# Altium PCB M1.6_A2L1_32mm.PcbDoc
Units mm, origin at the board's own origin, x right, y up, seen from the top; angles counter-clockwise.
Board outline 32 x 60 mm, 2 copper layers (Top Layer, Bottom Layer); 54 components, 59 nets, 219 pads, 131 vias.
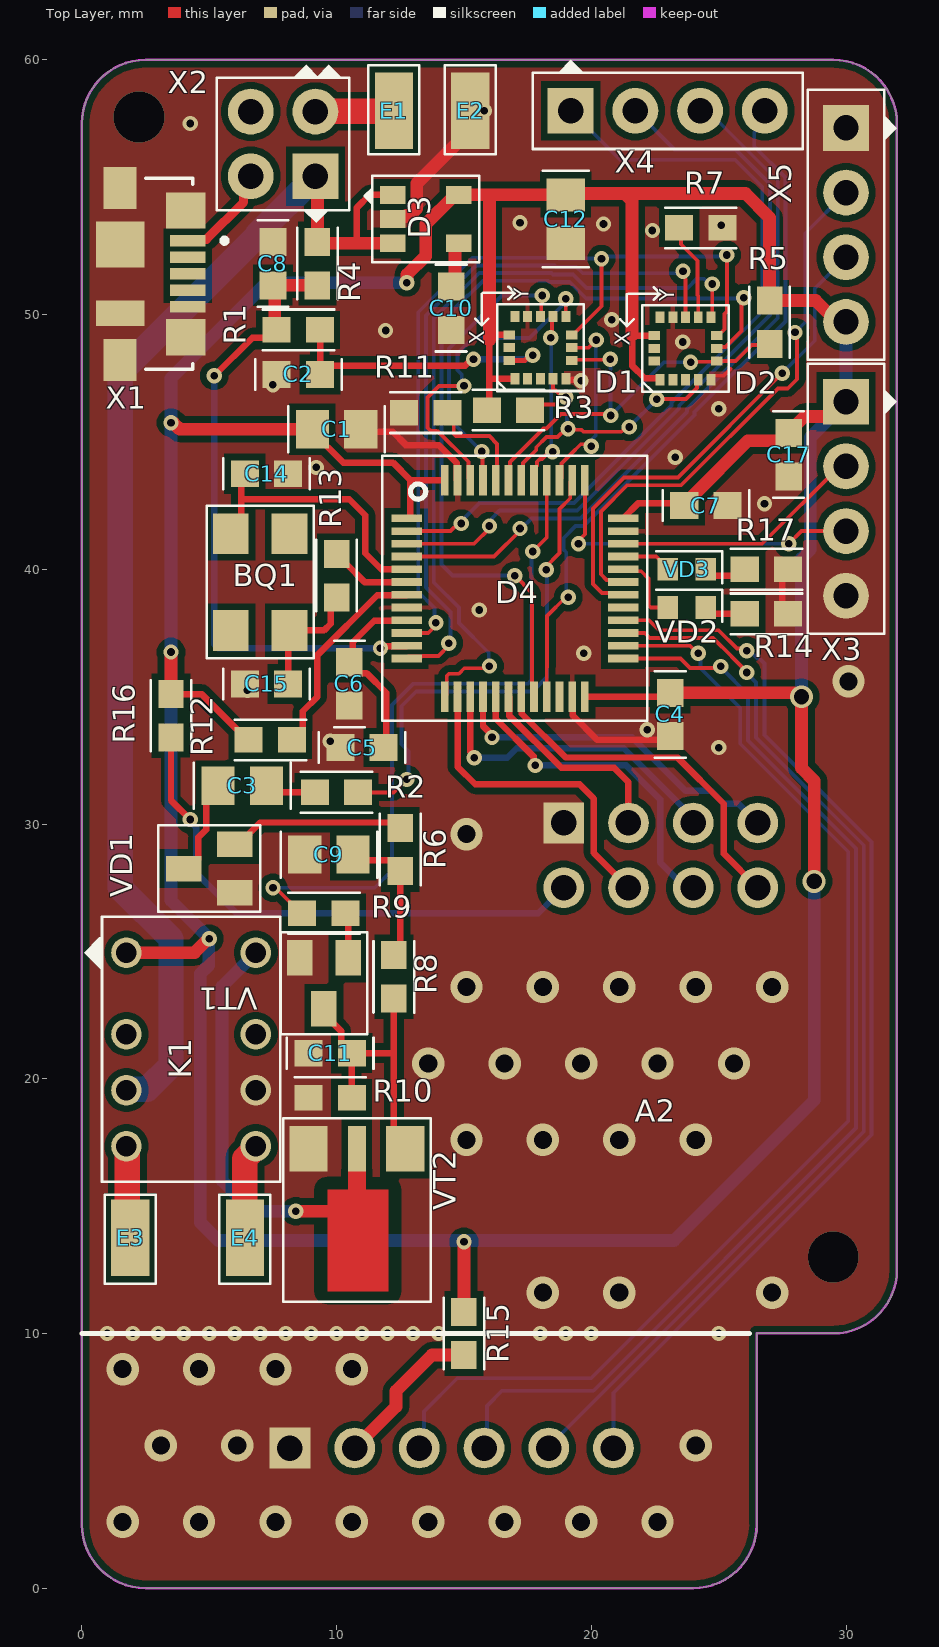
[diagram p0: Top Layer view]
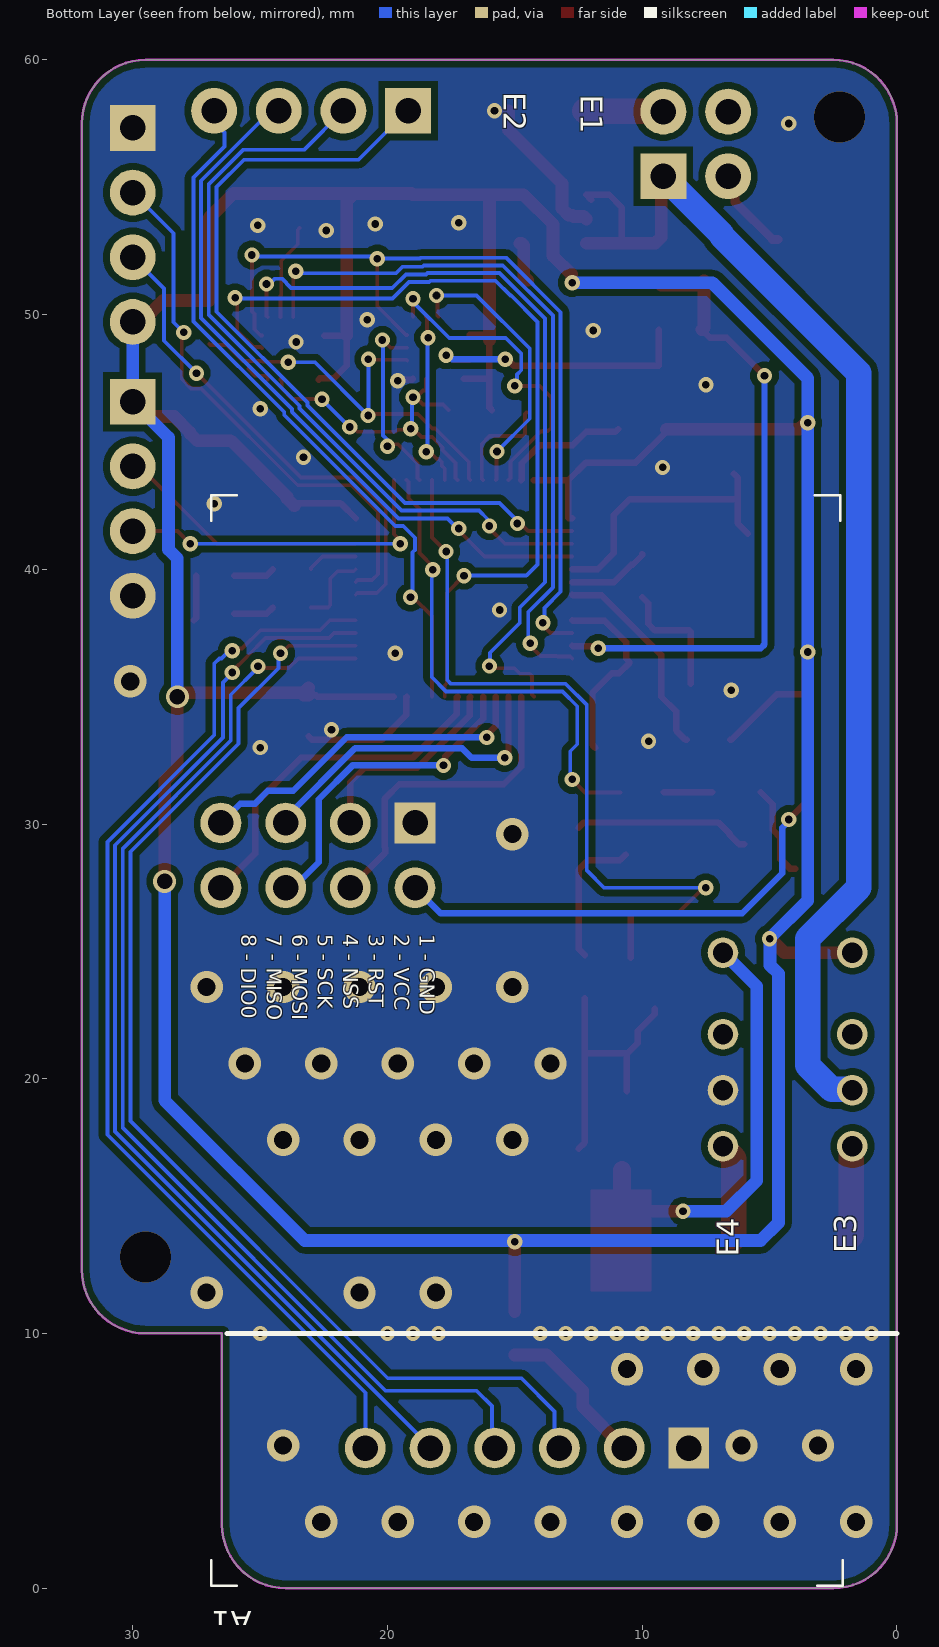
[diagram p1: Bottom Layer view, seen from below]
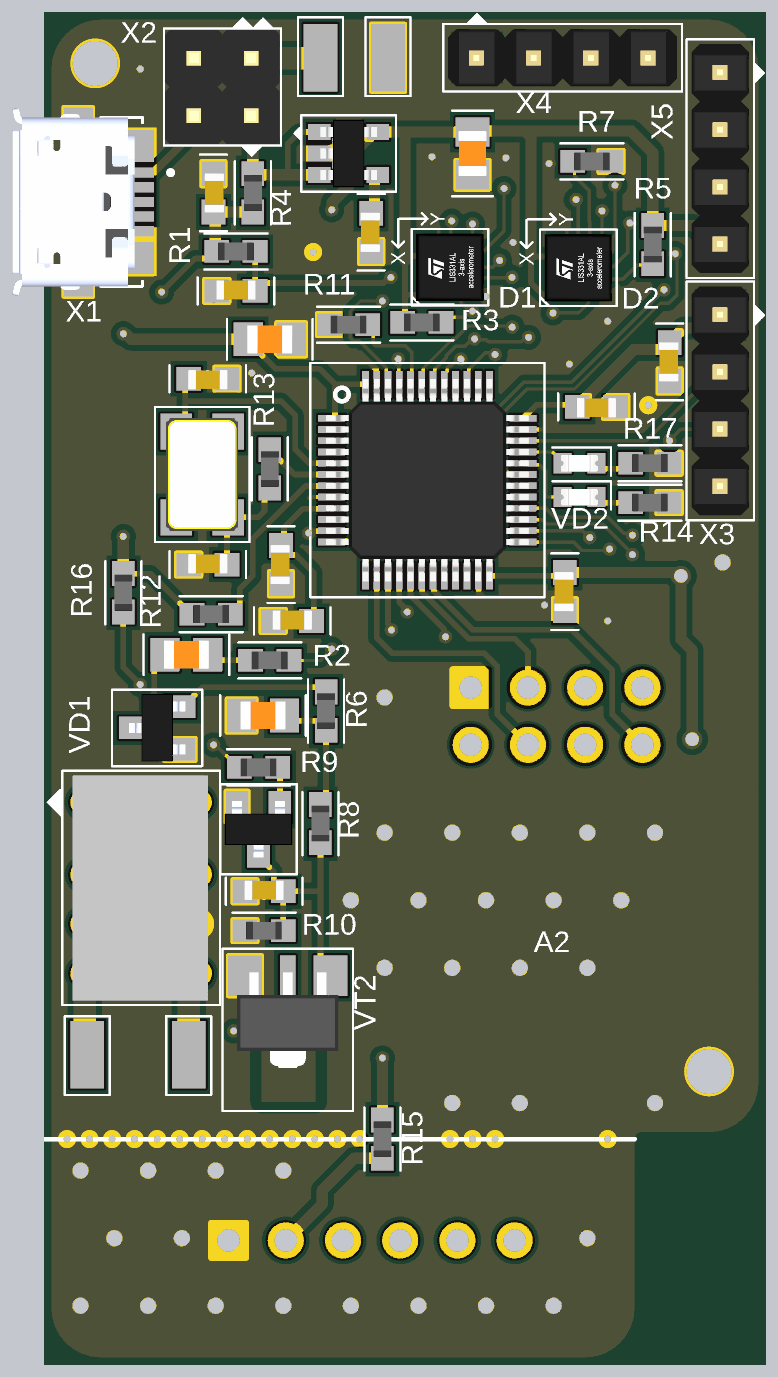
[diagram p2: 3D render of the assembled board from above, using the file's embedded part models]

## Layer stack, top to bottom
Top Solder: solder mask 0.0102, Solder Resist, Dk 3.5
Top Layer: signal copper 0.0356
Dielectric 1: dielectric 0.32, FR-4, Dk 4.8
Bottom Layer: signal copper 0.0356
Bottom Solder: solder mask 0.0102, Solder Resist, Dk 3.5

## Board outline
0,2.5 ccw(c2.5,2.5) 2.5,0 24,0 ccw(c24,2.5) 26.5,2.5 26.5,10 29.5,10 ccw(c29.5,12.5) 32,12.5 32,57.5 ccw(c29.5,57.5) 29.5,60 2.5,60 ccw(c2.5,57.5) 0,57.5

## Design rules (kind name [scope] priority, off if disabled: settings)
Clearance [All] p1: gap=0.254 ignorepadtopadclearanceinfootprint=TRUE except(0: Arc-Hole Track-Hole SMDPad-Hole THPad-Hole Via-Hole Fill-Hole Poly-Hole Region-Hole Text-Hole; 0.151: Track-SMDPad SMDPad-SMDPad SMDPad-THPad SMDPad-Via; 0.153: Arc-Arc Arc-Track Track-Track; 0.2: Arc-SMDPad Arc-Via Track-Via; 0.5: Fill-Fill Fill-Poly Fill-Region Region-Region)
HoleSize [All] p1: absolutevalues=TRUE maxlimit=2.54 minlimit=0.15 maxpercent=80.000 minpercent=20.000
MinimumSolderMaskSliver [All] p1: minsoldermaskwidth=0.1
PlaneClearance [All] p1: clearance=0.1
PlaneConnect [All] p1: planeconnectstyle=Direct reliefexpansion=0.508 reliefentries=4 reliefconductorwidth=0.254 reliefairgap=0.254
PolygonConnect [All] p1: connectstyle=Direct reliefconductorwidth=0.254 reliefentries=4 polygonreliefangle="90 Angle" airgapwidth=0.254
RoutingVias [All] p1: holewidth=0.3 width=1.27 viastyle="Through Hole" minholewidth=0.3 minwidth=0 maxholewidth=1 maxwidth=1.27
SilkToSilkClearance [All] p1: silktosilkclearance=0.151
SilkToSolderMaskClearance [IsPad] p1: minsilkscreentomaskgap=0.15 clearancetoexposedcopper=TRUE
SolderMaskExpansion [All] p1: expansion=0.102 istentingtop=FALSE
UnRoutedNet [All] p1: checkbadconnections=TRUE
Width [All] p1: maxlimit=1 minlimit=0.15 preferedwidth=0.254
23 further rules are at their usual default settings.

## Classes and differential pairs
net class UART_EXT: UART_RX UART_TX
net class SW_INT: SWCLK SWDIO
net class LED: LED1 LED2 UART_RX UART_TX
net class 8MHz: 8MHz_IN 8MHz_OUT NetBQ1_3

## Components (designator, comment, footprint, x,y, rotation, side; value= is the part's Value field where it differs from the comment)
A1 "Module SDCard-SPI 42*24mm" FileName=AdMainLibG_1.0:\PCBLib\0.pcblib#1 14.52,5.5 r90 bottom locked
A2 "Ra-01 (LoRa SX-1278)" FileName=AdMainLibG_1.0:\PCBLib\0.pcblib#2 22.73,28.77 r270 top locked
BQ1 "830055663" FileName=AdMainLibG_1.0:\PCBLib\0.pcblib#3 7,39.5 r270 top locked
C1 "10µ" FileName=AdMainLibG_1.0:\PCBLib\0.pcblib#4 10,45.5 r0 top
C2 "0.1µ" FileName=AdMainLibG_1.0:\PCBLib\0.pcblib#5 8.5,47.65 r180 top
C3 "10µ" FileName=AdMainLibG_1.0:\PCBLib\0.pcblib#4 6.3,31.5 r0 top locked
C4 "0.1µ" FileName=AdMainLibG_1.0:\PCBLib\0.pcblib#5 23.1,34.3 r270 top locked
C5 "0.1µ" FileName=AdMainLibG_1.0:\PCBLib\0.pcblib#5 11,33 r180 top locked
C6 "0.1µ" FileName=AdMainLibG_1.0:\PCBLib\0.pcblib#5 10.5,35.5 r270 top
C7 "0.1µ" FileName=AdMainLibG_1.0:\PCBLib\0.pcblib#5 24.5,42.5 r0 top
C8 "0.1µ" FileName=AdMainLibG_1.0:\PCBLib\0.pcblib#5 7.5,52 r90 top
C9 "10µ" FileName=AdMainLibG_1.0:\PCBLib\0.pcblib#4 9.7,28.8 r180 top
C10 "0.47 µ" FileName=AdMainLibG_1.0:\PCBLib\0.pcblib#5 14.5,50.25 r270 top
C11 "0.1µ" FileName=AdMainLibG_1.0:\PCBLib\0.pcblib#5 9.75,21 r180 top locked
C12 "10µ" FileName=AdMainLibG_1.0:\PCBLib\0.pcblib#4 19,53.75 r270 top locked
C14 "10p" FileName=AdMainLibG_1.0:\PCBLib\0.pcblib#5 7.25,43.75 r0 top locked
C15 "10p" FileName=AdMainLibG_1.0:\PCBLib\0.pcblib#5 7.25,35.5 r180 top locked
C17 "0.1µ" FileName=AdMainLibG_1.0:\PCBLib\0.pcblib#5 27.75,44.5 r270 top locked
D1 "LIS3DHTR" FileName=AdMainLibG_1.0:\PCBLib\0.pcblib#6 18,48.7 r90 top locked
D2 "LIS3DHTR" FileName=AdMainLibG_1.0:\PCBLib\0.pcblib#6 23.7,48.675 r90 top locked
D3 "MIC5219-3.3BM5-TR" FileName=AdMainLibG_1.0:\PCBLib\0.pcblib#7 13.5,53.75 r270 top locked
D4 "STM32F103C8T6TR" FileName=AdMainLibG_1.0:\PCBLib\0.pcblib#8 17,39.25 r270 top locked
E1 "Lamel_1pin" FileName=AdMainLibG_1.0:\PCBLib\0.pcblib#9 12.25,58 r0 top locked
E2 "Lamel_1pin" FileName=AdMainLibG_1.0:\PCBLib\0.pcblib#9 15.25,58 r0 top locked
E3 "Lamel_1pin" FileName=AdMainLibG_1.0:\PCBLib\0.pcblib#9 1.9,13.75 r180 top locked
E4 "Lamel_1pin" FileName=AdMainLibG_1.0:\PCBLib\0.pcblib#9 6.4,13.75 r180 top locked
K1 "IM02TS" FileName=AdMainLibG_1.0:\PCBLib\0.pcblib#10 4.29,21.15 r270 top locked
R1 "5K1" FileName=AdMainLibG_1.0:\PCBLib\0.pcblib#11 8.5,49.4 r0 top locked
R2 "0R" FileName=AdMainLibG_1.0:\PCBLib\0.pcblib#11 10,31.25 r180 top locked
R3 "10K" FileName=AdMainLibG_1.0:\PCBLib\0.pcblib#11 16.75,46.25 r180 top
R4 "5K1" FileName=AdMainLibG_1.0:\PCBLib\0.pcblib#11 9.25,52 r270 top
R5 "10K" FileName=AdMainLibG_1.0:\PCBLib\0.pcblib#11 27,49.7 r90 top locked
R6 "10K" FileName=AdMainLibG_1.0:\PCBLib\0.pcblib#11 12.5,29 r270 top locked
R7 "0R" FileName=AdMainLibG_1.0:\PCBLib\0.pcblib#11 24.3,53.4 r180 top locked
R8 "2K" FileName=AdMainLibG_1.0:\PCBLib\0.pcblib#11 12.25,24 r270 top locked
R9 "2K" FileName=AdMainLibG_1.0:\PCBLib\0.pcblib#11 9.5,26.5 r0 top locked
R10 "10K" FileName=AdMainLibG_1.0:\PCBLib\0.pcblib#11 9.75,19.25 r0 top
R11 "10K" FileName=AdMainLibG_1.0:\PCBLib\0.pcblib#11 13.5,46.15 r180 top
R12 "10K" FileName=AdMainLibG_1.0:\PCBLib\0.pcblib#11 7.4,33.3 r180 top locked
R13 "390R" FileName=AdMainLibG_1.0:\PCBLib\0.pcblib#11 10,39.75 r270 top locked
R14 "5K1" FileName=AdMainLibG_1.0:\PCBLib\0.pcblib#11 26.875,38.25 r0 top
R15 "0R" FileName=AdMainLibG_1.0:\PCBLib\0.pcblib#11 15,10 r90 top
R16 "0R" FileName=AdMainLibG_1.0:\PCBLib\0.pcblib#11 3.5,34.25 r90 top locked
R17 "5K1" FileName=AdMainLibG_1.0:\PCBLib\0.pcblib#11 26.875,40 r0 top
VD1 "BAS40-04-HE3-08" FileName=AdMainLibG_1.0:\PCBLib\0.pcblib#12 5,28.25 r270 top locked value=SOT-23-3
VD2 "19-213/GHC-YR1S2/3T" FileName=AdMainLibG_1.0:\PCBLib\0.pcblib#13 23.75,38.5 r0 top
VD3 "19-213/GHC-YR1S2/3T" FileName=AdMainLibG_1.0:\PCBLib\0.pcblib#13 23.75,40 r0 top
VT1 "BC846A,215" FileName=AdMainLibG_1.0:\PCBLib\0.pcblib#12 9.5,23.75 r0 top locked
VT2 "BC868-25,115" FileName=AdMainLibG_1.0:\PCBLib\0.pcblib#14 10.8,15.15 r180 top
X1 "47346-0001" FileName=AdMainLibG_1.0:\PCBLib\0.pcblib#15 1.5,51.6 r270 top
X2 "Header 2X2" FileName=AdMainLibG_1.0:\PCBLib\0.pcblib#16 7.9,56.7 r180 top locked
X3 "Header 1X4" FileName=AdMainLibG_1.0:\PCBLib\0.pcblib#17 30,42.77 r270 top locked
X4 "Header 1X4" FileName=AdMainLibG_1.0:\PCBLib\0.pcblib#17 23,58 r0 top locked
X5 "Header 1X4" FileName=AdMainLibG_1.0:\PCBLib\0.pcblib#17 30,53.52 r270 top locked

## Footprints (in the part's own frame and the unit in brackets; to place one, negate y for a bottom-side part, rotate by r counter-clockwise, add the part's x,y. Pads: shape width x height; smd on the part's side, far side on the other; paste and mask are expansions set on the pad)
FileName=AdMainLibG_1.0:\PCBLib\0.pcblib#1 [mm] "Arduino MicroSD to SPI Card reader 42*24*12mm"
  rect 1.6x1.6 hole 1: 1(0,-6.35)
  round 1.6 hole 1: 2(0,-3.81) 3(0,-1.27) 4(0,1.27) 5(0,3.81) 6(0,6.35)
  silkscreen extent -5.4,-12.4 37.4,12.4
FileName=AdMainLibG_1.0:\PCBLib\0.pcblib#2 [mm] "Ra-01"
  rect 1.6x1.6 hole 1 unplated mask+0.15: 1(-1.27,-3.81)
  round 1.6 hole 1 mask+0.15: 2(1.27,-3.81) 3(-1.27,-1.27) 4(1.27,-1.27) 5(-1.27,1.27) 6(1.27,1.27) 7(-1.27,3.81) 8(1.27,3.81)
FileName=AdMainLibG_1.0:\PCBLib\0.pcblib#3 [mm] "WE-830055663"
  rect 1.6x1.4 smd: 1(-1.9,-1.15) 2(1.9,-1.15) 3(1.9,1.15) 4(-1.9,1.15)
  silkscreen extent -3,-2.1 3,2.1, body extent -2.5,-1.6 2.5,1.6, height 1
FileName=AdMainLibG_1.0:\PCBLib\0.pcblib#4 [mm] "CC0805KKX7R6BB106"
  rect 1.3x1.5 smd: 1(-0.95,0) 2(0.95,0)
  silkscreen extent -1.9,-0.9 1.9,0.9, body extent -1,-0.63 1,0.63, height 0.8
FileName=AdMainLibG_1.0:\PCBLib\0.pcblib#5 [mm] "CC0603KRX7R9BB104"
  rect 1.1x1.05 smd paste+0: 1(-0.85,0)
  rect 1.1x1.05 smd: 2(0.85,0)
  silkscreen extent -1.7,-0.6 1.7,0.6, body extent -0.87,-0.48 0.87,0.4, height 0.95
FileName=AdMainLibG_1.0:\PCBLib\0.pcblib#6 [mm] "LIS3DHTR (3*3)"
  rect 0.45x0.35 smd paste-1 mask+0.05: 1(-1.225,1)
  rect 0.45x0.35 smd mask+0.05: 2(-1.225,0.5) 3(-1.225,0) 4(-1.225,-0.5) 5(-1.225,-1) 9(1.225,-1) 10(1.225,-0.5) 11(1.225,0) 12(1.225,0.5) 13(1.225,1)
  rect 0.35x0.45 smd mask+0.05: 6(-0.5,-1.225) 7(0,-1.225) 8(0.5,-1.225) 14(0.5,1.225) 15(0,1.225) 16(-0.5,1.225)
  silkscreen extent -1.7,-1.7 2.4,2.56, body extent -1.5,-1.5 1.5,1.5, height 1.01
FileName=AdMainLibG_1.0:\PCBLib\0.pcblib#7 [mm] "MIC5219-3.3BM5-TR"
  rect 0.7x1 smd: 1(-0.95,-1.3) 2(0,-1.3) 3(0.95,-1.3) 4(0.95,1.3) 5(-0.95,1.3)
  silkscreen extent -1.7,-2.4 1.7,2.1, body extent -1.5,-1.25 1.5,1.25, height 1.05
FileName=AdMainLibG_1.0:\PCBLib\0.pcblib#8 [mm] "Dest: STM32F103C8T6 - (7*7)"
  rect 0.3x1.2 smd: 1(-2.75,-4.25) 2(-2.25,-4.25) 3(-1.75,-4.25) 4(-1.25,-4.25) 5(-0.75,-4.25) 6(-0.25,-4.25) 7(0.25,-4.25) 8(0.75,-4.25) 9(1.25,-4.25) 10(1.75,-4.25) 11(2.25,-4.25) 12(2.75,-4.25) 25(2.75,4.25) 26(2.25,4.25) 27(1.75,4.25) 28(1.25,4.25) 29(0.75,4.25) 30(0.25,4.25) 31(-0.25,4.25) 32(-0.75,4.25) 33(-1.25,4.25) 34(-1.75,4.25) 35(-2.25,4.25) 36(-2.75,4.25)
  rect 1.2x0.3 smd: 13(4.25,-2.75) 14(4.25,-2.25) 15(4.25,-1.75) 16(4.25,-1.25) 17(4.25,-0.75) 18(4.25,-0.25) 19(4.25,0.25) 20(4.25,0.75) 21(4.25,1.25) 22(4.25,1.75) 23(4.25,2.25) 24(4.25,2.75) 37(-4.25,2.75) 38(-4.25,2.25) 39(-4.25,1.75) 40(-4.25,1.25) 41(-4.25,0.75) 42(-4.25,0.25) 43(-4.25,-0.25) 44(-4.25,-0.75) 45(-4.25,-1.25) 46(-4.25,-1.75) 47(-4.25,-2.25) 48(-4.25,-2.75)
  silkscreen extent -5.2,-5.2 5.2,5.2, body extent -4.5,-4.5 4.5,4.5, height 1.6
FileName=AdMainLibG_1.0:\PCBLib\0.pcblib#9 [mm]
  rect 1.5x3 smd: 1(0,0)
  silkscreen extent -1,-1.7 1,1.79
FileName=AdMainLibG_1.0:\PCBLib\0.pcblib#10 [mm] "IM02TS (THT VERSION)"
  round 1.2 hole 0.8: 1(-3.8,-2.54) 2(-0.6,-2.54) 3(1.6,-2.54) 4(3.8,-2.54) 5(3.8,2.54) 6(1.6,2.54) 7(-0.6,2.54) 8(-3.8,2.54)
  silkscreen extent -5.2,-4.2 5.2,3.5, body extent -4.99,-3.04 5.01,2.96, height 4.65
FileName=AdMainLibG_1.0:\PCBLib\0.pcblib#11 [mm]
  rect 1.1x1 smd: 1(-0.85,0) 2(0.85,0)
  silkscreen extent -1.4,-0.8 1.4,0.8, body extent -0.8,-0.4 0.8,0.4, height 0.45
FileName=AdMainLibG_1.0:\PCBLib\0.pcblib#12 [mm] "BC846"
  rect 1x1.4 smd: 1(0.95,1) 2(-0.95,1) 3(0,-1)
  silkscreen extent -1.7,-2 1.7,2, body extent -1.5,-1.25 1.5,1.25, height 1.1
FileName=AdMainLibG_1.0:\PCBLib\0.pcblib#13 [mm] "Led_19/213_EVERLIGHT"
  rect 0.8x0.9 smd: 1(-0.75,0) 2(0.75,0)
  silkscreen extent -1.2,-0.55 1.4,0.7, body extent -0.83,-0.37 0.82,0.36, height 0.68
FileName=AdMainLibG_1.0:\PCBLib\0.pcblib#14 [mm] "BC868 Transistor NPN"
  rect 1.5x1.8 smd: 1(1.9,-2.1) 3(-1.9,-2.1)
  rect 0.7x1.8 smd: 2(0,-2.1)
  Top Layer region: -1.237,-0.5 1.163,-0.5 1.163,3.5 -1.237,3.5
  Top Layer lines w0.7: 0,-0.5 0,-1.275
  silkscreen extent -2.9,-3.3 2.9,3.9, body extent -2.25,-2.25 2.25,2, height 1.54
FileName=AdMainLibG_1.0:\PCBLib\0.pcblib#15 [mm] "Molex MicroUSB 473460001"
  rect 0.45x1.38 smd: 1(-1.3,2.66) 2(-0.65,2.66) 3(0,2.66) 4(0.65,2.66) 5(1.3,2.66)
  rect 1.425x1.55 smd: S1(-2.488,2.575) S2(2.487,2.575)
  rect 1.65x1.3 smd: S3(-3.375,0) S6(3.375,0)
  rect 1.8x1.9 smd: S4(-1.15,0)
  rect 1x1.9 smd: S5(1.55,0)
  silkscreen extent -3.75,1 3.75,4.2, body extent -4.18,-2.93 4.18,2.5, height 2.7
FileName=AdMainLibG_1.0:\PCBLib\0.pcblib#16 [mm] "2R2 ( pitch 2.54mm) KLS1-207-2-2S"
  rect 1.8x1.8 hole 1: 1(-1.27,1.27)
  round 1.8 hole 1: 2(-1.27,-1.27) 3(1.27,1.27) 4(1.27,-1.27)
  silkscreen extent -2.6,-3.1 2.6,3.1, body extent -2.54,-2.54 2.54,2.54, height 8.54
FileName=AdMainLibG_1.0:\PCBLib\0.pcblib#17 [mm] "1R4 ( pitch 2.54mm) KLS1-207-1-4S"
  rect 1.8x1.8 hole 1: 1(-3.81,0)
  round 1.8 hole 1: 2(-1.27,0) 3(1.27,0) 4(3.81,0)
  silkscreen extent -5.3,-1.5 5.3,2, body extent -5.08,-1.27 5.08,1.27, height 9.2

## Part data
A1: library part "Module SDCard-SPI", "MicroSD Card adapter (42*24mm)/Arduino", Current consumption typ(max)="80mA (200mA)", Supply voltage=5±0.5V, ComponentLink1Description=Link, ComponentLink1URL=http://datalogger.pbworks.com/w/file/fetch/89507207/Datalogger%20-%20SD%20Memory%20Reader%20Datasheet.pdf, Connections="6pin IDC1-6", Dimensions=42*24*12mm, Manufacture Part Number="Module SDCard-SPI 42*24mm", Support format="Micro SDCard(<=2G), Micro SDHC(<=32G)", Weight=5g
A2: library part "Module SX1278", "SX1278 LoRa  433 MHZ/SPI /Spring Antenna/Ra - 01", ComponentLink1Description=Link, ComponentLink1URL=http://www.ai-thinker.com/pro_view-5.html, Manufacture Part Number="Ra-01 (LoRa SX-1278)"
BQ1: "WE-XTAL QUARTZ CRYSTAL 8.0 MHZ", Digi-Key Part Number=1923-830055663TR-ND, ESR (Equivalent Series Resistance)="150 Ohms", Frequency="8 MHz", Frequency Stability=±30ppm, Frequency Tolerance=±20ppm, Load Capacitance=18pF, Manufacture="Würth Elektronik", Operating Mode=Fundamental, Package/Case="4-SMD, No Lead", Catagory="Crystals, Oscillators, Resonators, Crystals", ComponentLink1Description=HelpURL, ComponentLink1URL=https://www.digikey.com/en/products/detail/w%C3%BCrth-elektronik/830055663/13900244?s=N4IgTCBcDaIBwGYAMSCsqBsGEgLoF8g, Manufacture Part Number=830055663, Price ($)=$0.65, Series=CFPX-104, Type="MHz Crystal"
C1 C3 C9 C12: library part CC0805KKX7R6BB106, "CAP CER 10UF 10V X7R 0805", Digi-Key Part Number=311-1879-2-ND, Manufacture=YAGEO, Package/Case="0805 (2012 Metric)", Temperature Coefficient=X7R, Tolerance=±10%, Capacitance=10µ, Catagory="Capacitors, Ceramic Capacitors", ComponentLink2Description=Link, ComponentLink2URL=https://www.digikey.com/en/products/detail/yageo/CC0805KKX7R6BB106/5195285, Manufacture Part Number=CC0805KKX7R6BB106, Price($/10)=$1.62
C2 C4 C5 C6 C7 C8 C11 C17: library part CC0603KRX7R9BB104, "CAP CER 0.1UF 50V X7R 0603", Digi-Key Part Number=311-1344-2-ND, Manufacture=YAGEO, Package/Case="0603 (1608 Metric)", Temperature Coefficient=X7R, Tolerance=±10%, Capacitance=0.1µ, Catagory="Capacitors, Ceramic Capacitors", ComponentLink2Description=Link, ComponentLink2URL=https://www.digikey.com/en/products/detail/yageo/CC0603KRX7R9BB104/2103082?s=N4IgTCBcDaIMJwAwDZEGYDSAlAGgdiwE4AhYgRkQBYQBdAXyA, Manufacture Part Number=CC0603KRX7R9BB104, Price($/10)=$0.54
C10: library part CC0603KRX7R6BB474, "CAP CER 0.47UF 10V X7R 0603", Digi-Key Part Number=311-1798-2-ND, Manufacture=YAGEO, Package/Case="0603 (1608 Metric)", Temperature Coefficient=X7R, Tolerance=±10%, Capacitance="0.47 µ", Catagory="Capacitors, Ceramic Capacitors", ComponentLink2Description=Link, ComponentLink2URL=https://www.yageo.com/upload/media/product/productsearch/datasheet/mlcc/UPY-GPHC_X7R_6.3V-to-50V_20.pdf, ComponentLink3Description="Link supplier", ComponentLink3URL=https://www.digikey.com/en/products/detail/yageo/CC0603KRX7R6BB474/5195206?s=N4IgTCBcDaIMJwAwDZEGYDSAlAGgdi2QCEiAWPUkAXQF8g, Manufacture Part Number=CC0603KRX7R6BB474, Price($/10)=$1.22
C14 C15: library part CQ0603JRNPO9BN100, "CAP CER 10PF 50V C0G/NPO 0603", Digi-Key Part Number=CQ0603JRNPO9BN100-ND, Manufacture=YAGEO, Package/Case="0603 (1608 Metric)", Temperature Coefficient="COG, NPO", Tolerance=±5%, Capacitance=10p, Catagory="Capacitors, Ceramic Capacitors", ComponentLink2Description=Link, ComponentLink2URL=https://www.digikey.com/en/products/detail/yageo/cq0603jrnpo9bn100/6097785, Manufacture Part Number=CQ0603JRNPO9BN100, Price($/20k)=$970,8
D1 D2: "ACCEL 2-16G I2C/SPI 16LGA", Digi-Key Part Number="497-10613-2-ND - Tape & Reel", Manufacture=STMicroelectronics, Package/Case="16-LGA (3x3)", Catagory="Sensors, Transducers, Motion Sensors - Accelerometers", ComponentLink2Description=Link, ComponentLink2URL=https://www.st.com/en/mems-and-sensors/lis3dh.html, ComponentLink3Description="Link Supplier", ComponentLink3URL=https://www.digikey.com/en/products/detail/stmicroelectronics/LIS3DHTR/2334338?s=N4IgTCBcDaIDIEkDKBmAIgCQCoCUQF0BfIA, Manufacture Part Number=LIS3DHTR, Price($)=$2.11000
D3: "IC REG LINEAR 3.3V 500MA SOT23-5", Current - Output=500mA, Current - Quiescent (Iq)="8 µA", Manufacture="Microchip Technology", Package/Case=SOT-23-5, Voltage - Input (Max)=12V, Voltage - Output (Min/Fixed)=3.3V, Voltage Dropout (Max)="0.6V @ 500mA", Catagory="Integrated Circuits (ICs), Power Management (PMIC), Voltage Regulators - Linear", ComponentLink2Description=Link, ComponentLink2URL=https://ww1.microchip.com/downloads/en/DeviceDoc/MIC5219-500mA-Peak-Output-LDO-Regulator-DS20006021A.pdf, ComponentLink3Description="Link Supplier", ComponentLink3URL=https://www.digikey.com/en/products/detail/microchip-technology/MIC5219-3-3BM5-TR/771289?s=N4IgTCBcDaILIEkDCBWMBGAnAWgMwDpcAhOFEAXQF8g, Control Features=Enable, Digi-Key Part Number=MIC5219-3.3BM5-TR, Manufacture Part Number=MIC5219-3.3BM5-TR, PSRR="75dB (120Hz)"
D4: library part STM32F103C8T6, "ARM® Cortex®-M3 STM32F1 Microcontroller IC 32-Bit Single-Core 72MHz 64KB (64K x 8) FLASH 48-LQFP (7x7)", Digi-Key Part Number=497-17666-2-ND, Manufacture=STMicroelectronics, Package/Case=48-LQFP, Catagory="Integrated Circuits (ICs), Embedded Microcontrollers", ComponentLink2Description=Link, ComponentLink2URL=https://www.digikey.com/en/products/detail/stmicroelectronics/STM32F103C8T6TR/2122442, Manufacture Part Number=STM32F103C8T6TR, Price($)=$7.64, sym_version=1
K1: "RELAY TELECOM DPDT 2A 4.5VDC", Coil Voltage=4.5VDC, Contact Rating (Current)="2 A", Digi-Key Part Number=PB1093-ND, Manufacture="TE Connectivity Potter & Brumfield Relays", Switching Voltage="250VAC, 220VDC - Max", Catagory="Relays, Signal Relays, Up to 2 Amps", ComponentLink2Description="Link Supplier", ComponentLink2URL=https://www.digikey.com/en/products/detail/te-connectivity-potter-brumfield-relays/IM02TS/1633979?s=N4IgTCBcDaIJIFkAMYAqBlEBdAvkA, ComponentLink3Description=Link, ComponentLink3URL=https://www.te.com/commerce/DocumentDelivery/DDEController?Action=srchrtrv&DocNm=1-1773734-7_IM_Relay_I_Type&DocType=DS&DocLang=English, Contact Form="DPDT (2 Form C)", Manufacture Part Number=IM02TS, Mounting Type="Through Hole", Price($)=$4.59, Series="IM, AXICOM"
R1 R4 R14 R17: library part RC0603FR-075K1L, "RES 5K1 OHM 1% 1/10W 0603", Digi-Key Part Number=311-5.10KHRTR-ND, Manufacture=Yageo, Package/Case="0603 (1608 Metric)", Power(Watts)="0.1W, 1/10W", Tolerance=±1%, Catagory=Resistors, ComponentLink1Description=HelpURL, ComponentLink1URL=https://www.digikey.com/en/products/detail/yageo/RC0603FR-075K1L/727268?s=N4IgTCBcDaIEoGEAMA2JBmAYnAtEg7AKwDSAjADIgC6AvkA, Manufacture Part Number=RC0603FR-075K1L, Price 1k($)=$3.90, Resistance=5K1
R2 R7 R15 R16: library part RC0603FR-070RL, "RES 0 OHM JUMPER 1/10W 0603", Digi-Key Part Number=311-0.0HRTR-ND, Manufacture=Yageo, Package/Case="0603 (1608 Metric)", Power(Watts)="0.1W, 1/10W", Tolerance=±1%, Catagory=Resistors, ComponentLink1Description="Link Supplier", ComponentLink1URL=https://www.digikey.com/en/products/detail/yageo/RC0603FR-075K1L/727268?s=N4IgTCBcDaIEoGEAMA2JBmAYnAtEg7AKwDSAjADIgC6AvkA, ComponentLink2Description=Link, ComponentLink2URL=https://www.yageo.com/upload/media/product/productsearch/datasheet/rchip/PYu-RC_Group_51_RoHS_L_12.pdf, Manufacture Part Number=RC0603FR-070RL, Price 1k($)=$3.29, Resistance=0R
R3 R5 R6 R10 R11 R12: library part RC0603FR-0710KL, "RES 10K OHM 1% 1/10W 0603", Digi-Key Part Number=311-10.0KHRTR-ND, Manufacture=Yageo, Package/Case="0603 (1608 Metric)", Power(Watts)="0.1W, 1/10W", Tolerance=±1%, Catagory=Resistors, ComponentLink1Description=HelpURL, ComponentLink1URL=https://www.digikey.com/en/products/detail/yageo/RC0603FR-0710KL/726880?s=N4IgTCBcDaIEoGEAMA2JBmAYnAtEg7AIxIDSAMiALoC%2BQA, Manufacture Part Number=RC0603FR-0710KL, Price 1k($)=$3.90, Resistance=10K
R8 R9: library part RC0603FR-072KL, "RES 2K OHM 1% 1/10W 0603", Digi-Key Part Number=311-2.00KHRTR-ND, Manufacture=Yageo, Package/Case="0603 (1608 Metric)", Power(Watts)="0.1W, 1/10W", Tolerance=±1%, Catagory=Resistors, ComponentLink1Description="Link Supplier", ComponentLink1URL=https://www.digikey.com/en/products/detail/yageo/RC0603FR-072KL/727009?s=N4IgTCBcDaIEoGEAMA2JBmAYnAtEg7GANIAyIAugL5A, ComponentLink2Description=Link, ComponentLink2URL=https://www.yageo.com/upload/media/product/productsearch/datasheet/rchip/PYu-RC_Group_51_RoHS_L_12.pdf, Manufacture Part Number=RC0603FR-072KL, Price 1k($)=$3.90, Resistance=2K
R13: library part RC0603FR-07390RL, "RES 390 OHM 1% 1/10W 0603", Digi-Key Part Number=311-390HRTR-ND, Manufacture=Yageo, Package/Case="0603 (1608 Metric)", Power(Watts)="0.1W, 1/10W", Tolerance=±1%, Catagory=Resistors, ComponentLink1Description=HelpURL, ComponentLink1URL=https://www.digikey.com/en/products/detail/yageo/RC0603FR-07390RL/727198, Manufacture Part Number=RC0603FR-07390RL, Price 1k($)=$3.90, Resistance=390R
VD1: library part BAS40-04, "DIODE ARRAY SCHOTTKY 40V SOT23", Current - Average Rectified (Io) (per Diode)=200mA, Current - Reverse Leakage @ Vr="100 nA @ 30 V", Digi-Key Part Number=112-BAS40-04-HE3-08TR-ND, Manufacture="Vishay General Semiconductor - Diodes Division", Package/Case=SOT-23-3, Voltage - DC Reverse (Vr) (Max)="40 V", Voltage - Forward (Vf) (Max) @ If="1 V @ 40 mA", Catagory="Discrete Semiconductor Products, Diodes - Rectifiers - Arrays", ComponentLink2Description="Link Supplier", ComponentLink2URL=https://www.digikey.com/en/products/detail/vishay-general-semiconductor-diodes-division/BAS40-04-HE3-08/4830200, ComponentLink3Description=Link, ComponentLink3URL=https://www.vishay.com/docs/85701/bas40v.pdf, Diode Configuration="1 Pair Series Connection", Diode Type=Schottky, Manufacture Part Number=BAS40-04-HE3-08, Price 10pcs($)="$3.03 per 10pcs", Reverse Recovery Time (trr)="5 ns"
VD2 VD3: "LED GREEN CLEAR 0603 SMD", Color=Green, Current - Test=20mA, Digi-Key Part Number=19-213/GHC-YR1S2/3T-ND, Lens Color=Colorless, Manufacture="Everlight Electronics Co Ltd", Millicandela Rating=199mcd, Package/Case="0603 (1608 Metric)", Voltage - Forward (Vf) (Typ)=3.3V, Catagory="Optoelectronics, LED Indication - Discrete", ComponentLink1Description=HelpURL, ComponentLink1URL=https://www.digikey.com/en/products/detail/everlight-electronics-co-ltd/19-213-GHC-YR1S2-3T/2691511?s=N4IgTCBcDaIDIFMAmACAjATgLRjQZgHoBxACQGEsBNAJTQGUwC8AVEAXQF8g, Height(Max)=0.70mm, Lens Size="1.20mm x 0.80mm", Lens Style="Rectangle with Flat Top", Lens Transparency=Clear, Manufacture Part Number=19-213/GHC-YR1S2/3T, Price 1k($)=$7.02, Viewing Angle=120°, Wavelength - Dominant=528nm, Wavelength - Peak=518nm
VT1: library part BC846, "TRANS NPN 65V 0.1A SOT-23-3", Current - Collector (Ic) (Max)="100 mA", Current - Collector Cutoff (Max)="15nA (ICBO)", DC Current Gain (hFE) (Min) @ Ic, Vce="110 @ 2mA, 5V", Digi-Key Part Number=1727-4239-2-ND, Frequency - Transition=100MHz, Manufacture="Nexperia USA Inc.", Operating Temperature="150°C (TJ)", Package/Case=SOT-323, Power(Watts)="250 mW", Voltage - Collector Emitter Breakdown (Max)="65 V", Catagory="Discrete Semiconductor Products, Transistors - Bipolar (BJT) - Single", ComponentLink1Description="Link Supplier", ComponentLink1URL=https://www.digikey.com/en/products/detail/nexperia-usa-inc/BC846A-215/1232259, ComponentLink2Description=Link, ComponentLink2URL=https://assets.nexperia.com/documents/data-sheet/BC846XW_SER.pdf, Manufacture Part Number=BC846A,215, Price ($)=$0.14, Vce Saturation (Max) @ Ib, Ic="400mV @ 5mA, 100mA"
VT2: library part BC868-25, "TRANS NPN 20V 2A SOT89", Current - Collector (Ic) (Max)="2 A", Current - Collector Cutoff (Max)="100nA (ICBO)", DC Current Gain (hFE) (Min) @ Ic, Vce="160 @ 500mA, 1V", Digi-Key Part Number=1727-1568-2-ND, Frequency - Transition=170MHz, Manufacture="Nexperia USA Inc.", Operating Temperature="150°C (TJ)", Package/Case=TO-243AA, Power(Watts)="500 mW", Voltage - Collector Emitter Breakdown (Max)="20 V", Catagory="Discrete Semiconductor Products, Transistors - Bipolar (BJT) - Single", ComponentLink1Description=Link, ComponentLink1URL=https://assets.nexperia.com/documents/data-sheet/BCP68_BC868_BC68PA.pdf, ComponentLink2Description="Link Supplier", ComponentLink2URL=https://www.digikey.com/en/products/detail/nexperia-usa-inc/BC868-25-115/1232370, Manufacture Part Number=BC868-25,115, Price ($)=$0.54, Transistor Type=NPN, Vce Saturation (Max) @ Ib, Ic="600mV @ 200mA, 2A"
X1: "CONN RCPT USB2.0 MICRO B SMD R/A", Current Rating (Amps)="1A, 1.8A", Digi-Key Part Number=WM17141TR-ND, Manufacture=Molex, Material Flammability Rating="UL94 V-0", Voltage - Rated=30VAC, Connector Type="USB - micro B", Contact Finish=Gold, Manufacture Part Number=47346-0001, Mating Cycles=10000, Mounting Feature=Horizontal, Mounting Type="Surface Mount, Right Angle", Series=47346, Shell/Shielding Material="Steel, Stainless", Shielding=Shielded, SnapEDA_Link=https://www.snapeda.com/parts/47346-0001/Molex/view-part/53503/?ref=snap, Specifications="USB 2.0"
X2: library part KLS1-207-2-2S, "2X2 Pin Header Double Row Through Hole Pitch 2.54(PLS-2)", Manufacture="Assmann WSW components, Inc", Manufacture Part Number="Header KLS1-207-2-2S", Catagory="Connector Headers and PCB Receptacles", ComponentLink1Description=HelpURL, ComponentLink1URL=https://www.arrow.com/en/products/aw140-eg-g02a/assmann-wsw-components-inc
X3 X4 X5: library part KLS1-207-1-4S, "1X4 Pin Header Single Row Through Hole Pitch 2.54", Manufacture="Assmann WSW components, Inc", Catagory="Connector Headers and PCB Receptacles", ComponentLink1Description=HelpURL, ComponentLink1URL=https://www.arrow.com/en/products/aw140-eg-g02a/assmann-wsw-components-inc

## Via types
v1: diameter 0.6, hole 0.3, Top Layer to Bottom Layer, tented both sides, 73 vias
v2: diameter 1.27, hole 0.711, Top Layer to Bottom Layer, tented both sides, 34 vias
v3: diameter 0.6, hole 0.3, Top Layer to Bottom Layer, 20 vias
v4: diameter 2, hole 2, Top Layer to Bottom Layer, 2 vias
v5: diameter 0.9, hole 0.6, Top Layer to Bottom Layer, tented both sides, 2 vias

## Nets (pads, with @x,y where several pads share a name; then routed paths per layer and width w, separated by ;. In a path a pad name is that pad's centre, name@x,y a point inside that pad or via, vN(x,y) a via of type N, cw(c..) or ccw(c..) an arc to the next point about the centre after c; other vN are vias at no path point)
8MHz_IN: BQ1.1 C14.1 D4.5 | length 11.1
  Top Layer w0.254: BQ1.1 6.25,41.8 6.25,42.75 ; C14.1 6.25,43.6 6.25,42.75 ; D4.5 11.75,40 11.125,40.625 11.125,42.125 10.5,42.75 6.25,42.75
8MHz_OUT: D4.6 R13.1 | length 3.2
  Top Layer w0.254: R13.1 10,40.55 10.373,40.177 10.423,40.177 11.1,39.5 D4.6
GND: A1.1 A2.1 C1.2 C2.2 C4.2 C5.2 C6.2 C7.2 C8.2 C9.2 C10.2 C11.2 C12.2 C14.2 C15.2 C17.2 D1.5 D1.12 D2.5 D2.12 D3.2 D4.8 D4.23 D4.35 D4.47 E2.1 K1.6 R7.1 R10.1 R11.2 R14.2 R17.2 VD1.1 VT1.2 VT2.1 X1.5 X1.S1 X1.S2 X1.S3 X1.S4 X1.S5 X1.S6 X3.4 X5.1 | length 19.3
  Top Layer w0.15: D2.5 24.7,47.5 24.8,47.6 25.197,47.6 25.469,47.872
  Top Layer w0.254: C1.2 11.05,45.4 12.2,45.4 12.723,44.877 14.016,44.877 14.727,44.166 14.727,43.523 D4.47 ; D1.5 19.038,47.438 19.562,47.438 v1(19.6,47.4) ; D4.23 19.273,34.977 19.273,34.265 20.238,33.3 22.95,33.3 C4.2 ; R17.2@27.5,39.75 27.5,38.1 R14.2@27.6,38
  Top Layer w0.5: D3.2 12.3,53.85 12.693,53.85 12.743,53.9 12.886,53.9 13.15,54.164 13.15,55.15 15.25,57.25 E2.1
  other v1: 25,33 9.75,33.25 22.2,33.7 6.5,35.25 19.7,36.7 15.6,38.4 9.2,44 23.3,44.4 25,46.3 7.5,47.25 23.59,48.922 20.8,49.8 22.4,53.3 25.1,53.5 20.482,53.555 17.2,53.6 4.25,57.5 15.8,58
  other v2: 1.6,2.6 4.6,2.6 7.6,2.6 10.6,2.6 13.6,2.6 16.6,2.6 19.6,2.6 22.6,2.6 3.1,5.6 6.1,5.6 24.1,5.6 1.6,8.6 4.6,8.6 7.6,8.6 10.6,8.6 18.1,11.6 21.1,11.6 27.1,11.6 15.1,17.6 18.1,17.6 21.1,17.6 24.1,17.6 13.6,20.6 16.6,20.6 19.6,20.6 22.6,20.6 25.6,20.6 15.1,23.6 18.1,23.6 21.1,23.6 24.1,23.6 27.1,23.6 15.1,29.6 30.1,35.6
  other v3: 1,10 2,10 3,10 4,10 5,10 6,10 7,10 8,10 9,10 10,10 11,10 12,10 13,10 14,10 18,10 19,10 20,10 25,10 26.8,42.575 11.925,49.375
  other v4: 29.5,13 2.25,57.75
LED1: D4.32 VD2.1 | length 3
  Top Layer w0.15: D4.32 21.325,39.925 21.964,39.925 22.25,39.639 22.25,38.588 22.338,38.5 VD2.1
LED2: D4.33 VD3.1 | length 2
  Top Layer w0.15: D4.33 22.55,40.5 23,40.05 VD3.1
LIS2_INT1: D2.11 D4.12 | length 28.2
  Top Layer w0.15: D4.12 12.825,36.575 13.338,36.575 13.363,36.6 14,36.6 14.4,37 v1(14.4,37.1) ; v1(23.6,51.7) 23.686,51.614 23.686,51.401 23.7,51.387 D2.11
  Bottom Layer w0.15: v1(14.4,37.1) 14.477,37.177 14.477,38.323 13.509,39.291 13.509,49.966 15.474,51.931 18.564,51.931 18.615,51.88 19.406,51.88 19.665,51.621 23.521,51.621 v1(23.6,51.7)
LIS2_INT2: D2.9 D4.13 | length 30.7
  Top Layer w0.15: D4.13 14.325,35.075 14.325,35.812 14.413,35.9 14.8,35.9 15.014,36.114 15.914,36.114 v1(16,36.2) ; D2.9 24.75,49.95 v1(24.749,51.2) v1(24.749,51.2)
  Bottom Layer w0.15: v1(16,36.2) 15.975,36.225 15.975,36.725 14.806,37.894 14.806,38.494 13.812,39.488 13.812,49.84 15.599,51.628 18.439,51.628 18.49,51.577 19.281,51.577 19.812,51.046 23.785,51.046 24.149,51.41 24.417,51.41 24.627,51.2 v1(24.749,51.2)
LIS_INT1: D1.11 D4.45 | length 11.1
  Top Layer w0.15: v1(15.7,44.625) 15.725,44.6 15.725,43.525 D4.45 ; D1.11@18,49.925 18.038,49.962 18.038,50.713 v1(18.075,50.75)
  Bottom Layer w0.15: v1(15.7,44.625) 14.418,45.907 14.418,48.668 16.5,50.75 v1(18.075,50.75)
LIS_INT2: D1.9 D4.46 | length 13
  Top Layer w0.15: v1(15,47.2) 14.025,47.2 13.574,46.749 13.574,45.556 13.706,45.424 13.906,45.424 13.92,45.411 13.985,45.411 15.175,44.22 15.175,43.575 D4.46 ; D1.9 v1(19,50.616)
  Bottom Layer w0.15: v1(15,47.2) 14.914,47.286 14.914,47.649 14.75,47.813 14.75,48.467 15.358,49.075 17.575,49.075 19,50.5 v1(19,50.616)
LIS_MODE: D1.8 D2.8 D4.10 | length 33.8
  Top Layer w0.15: D4.10 13.6,37.5 13.814,37.714 13.814,38.014 v1@13.9,38.1 ; D1.8 19.275,49.2 20.4,50.325 v1(20.4,52.196) ; D2.8 24.975,49.175 25.225,49.425 25.225,50.025 25.324,50.124 v1(25.324,52.341)
  Bottom Layer w0.15: v1@13.9,38.1 13.84,38.16 13.84,38.483 13.206,39.117 13.206,50.091 15.348,52.234 18.69,52.234 18.728,52.196 v1(20.4,52.196) 20.479,52.275 25.257,52.275 v1(25.324,52.341)
  other v1: 13.9,37.9
LoRa_DIO0: A2.8 D4.19 | length 13.9
  Top Layer w0.254: D4.19 17.273,34.977 17.273,34.334 18.996,32.611 23.389,32.611 25.2,30.8 25.2,28.84 A2.8
LoRa_MISO: A2.7 D4.16 | length 13.6
  Top Layer w0.25: D4.16 15.75,33.845 16.1,33.495 v1(16.1,33.4)
  Bottom Layer w0.25: v1(16.1,33.4) 21.6,33.4 23.7,31.3 24.7,31.3 25.2,30.8 25.78,30.8 A2.7
LoRa_MOSI: A2.6 D4.17 | length 13
  Top Layer w0.254: D4.17 16.25,34.137 17.734,32.653 17.734,32.366 v1(17.8,32.3)
  Bottom Layer w0.254: v1(17.8,32.3) 21.374,32.3 22.7,30.974 22.7,28.5 23.7,27.5 A2.6
LoRa_NSS: A2.4 D4.14 | length 12.7
  Top Layer w0.254: D4.14 14.75,32.25 15.439,31.561 19.538,31.561 20.101,30.998 20.101,29.082 20.095,29.076 20.095,28.865 A2.4
LoRa_RST: A2.3 D4.18 | length 8.1
  Top Layer w0.254: D4.18 16.773,34.977 16.773,34.258 18.827,32.204 20.896,32.204 21.46,31.64 A2.3
LoRa_SCK: A2.5 D4.15 | length 12.6
  Top Layer w0.254: D4.15 15.25,32.844 15.4,32.694 v1(15.4,32.6)
  Bottom Layer w0.254: v1(15.4,32.6) 16.7,32.6 17.075,32.975 21.275,32.975 24,30.25 A2.5
NetA1_2: A1.2 R15.1 | length 6.2
  Top Layer w0.5: A1.2 12.335,7.125 12.335,7.735 13.75,9.15 R15.1
NetA2_2: A2.2 R16.1 | length 21.2
  Top Layer w0.254: R16.1 3.5,30.927 v1(4.25,30.177)
  Bottom Layer w0.254: v1(4.25,30.177) 4.25,30.105 4.5,29.855 4.5,28.072 6.072,26.5 17.92,26.5 A2.2
NetBQ1_3: BQ1.3 C15.1 R13.2 | length 5
  Top Layer w0.254: C15.1 8.1,37.55 BQ1.3 9.503,37.6 9.768,37.865 9.768,38.368 9.768,38.668 R13.2
NetC2_1: C2.1 D1.16 R1.2 | length 10.9
  Top Layer w0.2: D1.16 17.392,48.2 17.592,48.4 v1(17.7,48.4)
  Top Layer w0.254: R1.2 9.35,48 15.051,48 15.301,48.25 v1(15.373,48.25)
  Bottom Layer w0.254: v1(15.373,48.25) 17.456,48.25 17.606,48.4 v1(17.7,48.4)
NetC3_1: C3.1 VD1.3 | length 3.7
  Top Layer w0.254: VD1.3 4.2,28.25 4.573,28.623 4.573,29.473 4.877,29.777 4.877,30.777 C3.1@5.35,31.25
NetC3_2: C3.2 R2.2 | length 1.9
  Top Layer w0.254: C3.2@7.25,31.25 R2.2
NetC9_1: C9.1 R6.2 R8.1 | length 5.6
  Top Layer w0.254: C9.1 10.877,28.573 12.127,28.573 12.5,28.2 12.5,25.1 R8.1
NetC10_1: C10.1 D3.4 | length 1.6
  Top Layer w0.5: C10.1@14.5,51.35 14.65,51.5 14.65,52.7 14.75,52.8 D3.4
NetC11_1: C11.1 R8.2 R10.2 VT1.3 VT2.3 | length 11.4
  Top Layer w0.254: VT1.3 9.5,22.55 10.177,21.873 10.177,21.398 10.575,21 C11.1 ; R10.2@10.6,19.5 C11.1 ; R8.2 12.25,21 ; VT2.3@12.5,17.25 12.25,17.5 12.25,21 ; C11.1 12.25,21
NetD2_10: D2.10 R7.2 | length 3.8
  Top Layer w0.15: R7.2 23.526,53.324 23.526,52.763 24.175,52.114 24.175,51.439 24.174,51.438 24.174,50.757 24.2,50.731 D2.10
NetD4_7: D4.7 R12.1 | length 8.3
  Top Layer w0.254: R12.1 8.3,33.3 8.673,33.673 8.673,34.423 9.25,35 9.25,36.638 11.597,38.985 12.735,38.985 D4.7
NetD4_44: D4.44 R11.1 | length 4.2
  Top Layer w0.154: R11.1@14.55,46.15 14.6,46.1 14.6,45.315 14.69,45.225 16,45.225 16.3,44.925 16.3,43.55 D4.44
NetE3_1: E3.1 K1.4 | length 3.7
  Top Layer w1: K1.4 1.788,17.312 1.788,13.862 E3.1
NetE4_1: E4.1 K1.5 | length 3.8
  Top Layer w1: E4.1 6.4,16.866 6.83,17.296 K1.5
NetK1_8: K1.8 VT2.2 | length 15.5
  Top Layer w0.5: v1(8.4,14.8) 10.7,14.8 10.9,14.6
  Bottom Layer w0.5: K1.8 5.5,23.62 5.5,16 6.7,14.8 v1(8.4,14.8)
NetR6_1: R6.1 VD1.2 | length 7
  Top Layer w0.254: VD1.2 6.2,29.2 6.573,29.573 6.573,29.625 7.007,30.059 12.291,30.059 R6.1
NetR9_2: R9.2 VT1.1 | length 1.8
  Top Layer w0.254: R9.2 10.45,26.4 VT1.1
NetR14_1: R14.1 VD2.2 | length 1.6
  Top Layer w0.254: VD2.2 24.75,38.25 R14.1
NetR17_1: R17.1 VD3.2 | length 1.6
  Top Layer w0.254: VD3.2 24.75,39.75 R17.1@26.025,39.75
PB10: D4.21 X4.4 | length 27.9
  Top Layer w0.15: D4.21 18.25,36.15 18.26,36.16 18.26,38.16 19,38.9 v1(19.1,38.9)
  Bottom Layer w0.15: v1(19.1,38.9) 19.015,38.985 19.015,40.669 18.922,40.762 18.922,41.238 19.381,41.697 19.697,41.697 24.056,46.056 24.056,46.17 27.621,49.734 27.621,55.379 26.4,56.6 26.4,57.144 26.81,57.554 X4.4
PC13: D4.2 X4.1 | length 31.3
  Top Layer w0.15: D4.2 14.478,41.5 14.778,41.8 v1(14.9,41.8)
  Bottom Layer w0.15: v1(14.9,41.8) 14.9,41.9 15.606,42.606 19.32,42.606 23.147,46.433 23.147,46.546 26.712,50.111 26.712,55.002 25.637,56.077 21.133,56.077 X4.1@19.21,58
PC14: D4.3 X4.2 | length 29.8
  Top Layer w0.15: D4.3 15.393,41 16,41.607 v1(16,41.7)
  Bottom Layer w0.15: v1(16,41.7) 16.086,41.786 16.086,41.986 16.403,42.303 19.446,42.303 23.45,46.307 23.45,46.421 27.015,49.985 27.015,55.128 25.675,56.468 23.282,56.468 X4.2@21.75,58
PC15: D4.4 X4.3 | length 28.1
  Top Layer w0.15: D4.4 16.187,40.5 17.2,41.513 v1(17.2,41.6)
  Bottom Layer w0.15: v1(17.2,41.6) 17.249,41.6 17.649,42 19.571,42 23.753,46.182 23.753,46.295 27.318,49.86 27.318,55.253 24.571,58 X4.3@24.29,58
PDC_OUT_EN: D4.40 R9.1 | length 27
  Top Layer w0.15: v1(7.504,27.5) 7.6,27.5 8.6,26.5 R9.1 ; v1(17.7,40.7) 18.25,41.25 D4.40
  Bottom Layer w0.15: v1(7.504,27.5) 11.5,27.5 12.175,28.175 12.175,34.675 13.003,35.503 17.503,35.503 17.654,35.654 17.654,40.654 v1(17.7,40.7)
PDC_OUT_PWM: D4.38 R2.1 | length 19.5
  Top Layer w0.15: R2.1 10.857,31.243 12.243,31.243 v1(12.75,31.75) ; v1(18.229,39.986) 18.229,40.108 18.494,40.373 18.494,40.382 18.75,40.638 18.75,42.361 19.175,42.786 19.175,42.887 19.175,43.425 D4.38
  Bottom Layer w0.15: v1(12.75,31.75) 12.825,31.825 12.825,32.859 12.553,33.131 12.553,34.624 13.129,35.2 17.7,35.2 18.265,35.765 18.265,39.951 v1(18.229,39.986)
RES_LIS1: D1.10 D4.41 | length 6.9
  Top Layer w0.15: D4.41 17.75,43.95 17.874,44.074 17.874,44.219 17.981,44.326 18.066,44.326 18.359,44.619 v1(18.481,44.619) ; v1(18.407,49.093) 18.453,49.14 18.453,49.878 D1.10@18.5,49.925
  Bottom Layer w0.15: v1(18.407,49.093) 18.425,49.075 18.425,44.675 v1(18.481,44.619)
SA0_LIS1: D1.7 D4.39 | length 7.6
  Top Layer w0.15: D4.39 18.825,43.575 18.825,44.15 19.205,44.531 ; 19.205,44.531 19.585,44.911
  Top Layer w0.151: D1.7 19.887,48.7 20.187,49 v1(20.2,49) ; 19.585,44.911 19.914,44.911 v1(20,44.825)
  Bottom Layer w0.151: v1(20,44.825) 20,45.084 20.175,45.259 20.175,47.638 20.174,47.639 20.174,48.974 v1(20.2,49)
SA0_LIS2: D2.7 D4.20 | length 33.1
  Top Layer w0.15: v1(17,39.75) 17.675,39.075 17.675,35.525 17.75,35.45 D4.20 ; D2.7 24.975,48.725 25.264,48.725 25.899,49.36 25.899,50.574 v1(25.985,50.66)
  Bottom Layer w0.15: v1(17,39.75) 14.55,39.75 14.115,40.185 14.115,49.715 15.143,50.743 15.17,50.743 15.752,51.325 18.313,51.325 18.364,51.274 19.155,51.274 19.804,50.625 25.95,50.625 v1(25.985,50.66)
SCL_LIS: D1.4 D2.4 D4.42 R3.1 | length 13.1
  Top Layer w0.15: D4.42 17.325,43.575 17.325,44.177 17.837,44.689 17.837,44.789 18.243,45.194 18.671,45.194 18.995,45.518 v1(19.089,45.518) ; R3.1 17.825,46.475 18.603,46.475 v1@18.878,46.75 ; D1.4 18.5,47.022 18.606,47.022 v1@18.878,46.75 ; v1(19,46.75) v1@18.878,46.75 ; v1@19.046,45.475 19.614,45.475 19.689,45.4 21.18,45.4 21.365,45.585 v1(21.486,45.585) ; v1(22.572,46.671) 22.587,46.686 23.725,46.686 24.15,47.111 24.15,47.4 D2.4
  Bottom Layer w0.15: v1(19,46.75) 19.044,46.705 19.044,45.563 v1(19.089,45.518) ; v1(21.486,45.585) v1(22.572,46.671)
SD_MISO: A1.3 D4.26 | length 46.9
  Top Layer w0.151: D4.26 23.879,37 24.179,36.7 v1@24.3,36.7
  Bottom Layer w0.151: A1.3 13.438,5.688 13.438,6.938 14.739,8.239 19.989,8.239 30.088,18.338 30.088,28.912 25.85,33.15 25.85,34.55 24.286,36.114 24.286,36.614 v1(24.2,36.7)
SD_MOSI: A1.4 D4.25 | length 45
  Top Layer w0.151: D4.25 23.5,36.5 23.876,36.124 25.024,36.124 v1(25.087,36.187)
  Bottom Layer w0.151: A1.4 15.9,5.61 15.9,7.15 16.5,7.75 20.08,7.75 30.392,18.062 30.392,29.038 26.157,33.273 26.157,35.075 25.087,36.145 v1(25.087,36.187)
SD_NSS: A1.6 D4.28 | length 43
  Top Layer w0.151: D4.28 22.26,38 22.652,37.608 24.992,37.608 25.714,36.886 26.014,36.886 v1(26.1,36.8)
  Bottom Layer w0.151: A1.6 20.87,7.67 31,17.8 31,29.29 26.8,33.49 26.8,36.3 26.599,36.501 26.521,36.501 26.221,36.8 v1(26.1,36.8)
SD_SCK: A1.5 D4.27 | length 43
  Top Layer w0.151: D4.27 22.1,37.5 22.296,37.304 24.785,37.304 25.525,36.564 25.525,36.562 26.1,35.986 v1(26.1,35.946)
  Bottom Layer w0.151: A1.5 18.33,5.56 30.696,17.926 30.696,29.164 26.461,33.399 26.461,35.562 26.1,35.923 v1(26.1,35.946)
SDA_LIS: D1.6 D2.6 D4.43 R5.1 | length 16.7
  Top Layer w0.15: D4.43 16.809,43.559 16.809,44.209 18.124,45.524 18.244,45.524 18.813,46.093 20.707,46.093 v1@20.8,46 ; D1.6 19.25,48.225 20.725,48.225 v1(20.75,48.25) ; v1(23.899,48.125) 23.924,48.15 24.9,48.15 D2.6 25.674,48.175 26.299,48.8 26.95,48.8 R5.1
  Bottom Layer w0.15: v1(20.75,48.25) 20.75,46.05 v1(20.762,46.038) 22.85,48.125 v1(23.899,48.125)
SWCLK: D4.37 X3.3 | length 13.3
  Top Layer w0.15: v1(19.497,41) 19.497,41.122 19.75,41.375 D4.37 ; v1(27.75,41) 28.25,41.5 X3.3
  Bottom Layer w0.15: v1(19.497,41) v1(27.75,41)
SWDIO: D4.34 X3.2 | length 10
  Top Layer w0.15: D4.34 26.7,41 29.74,44.04 X3.2
UART_RX: D4.31 X5.2 | length 21.5
  Top Layer w0.15: D4.31 21.175,39.575 20.603,39.575 20.375,39.803 20.375,40.764 20.375,41.617 20.375,42.264 21.408,43.297 23.526,43.297 27.329,47.1 27.713,47.1 28.075,47.462 28.075,49.225 v1(28,49.3)
  Bottom Layer w0.15: v1(28,49.3) 28.4,49.7 28.4,53.19 X5.2
UART_TX: D4.30 X5.3 | length 19.5
  Top Layer w0.15: D4.30 21.175,39.075 20.425,39.075 20.072,39.428 20.072,40.889 20.072,41.491 20.072,42.389 21.283,43.6 23.4,43.6 v1(27.5,47.7)
  Bottom Layer w0.15: v1(27.5,47.7) 28.771,48.971 28.771,51.021 X5.3
V_SOURCE: D3.1 D3.3 K1.3 R4.1 X2.1 | length 49.8
  Top Layer w0.254: 10.9,52.8 10.8,52.9 10.8,54.2 11.3,54.7 D3.1 D3.1@12.01,54.51
  Top Layer w0.5: X2.1 9.25,55.35 9.25,53.05 9.5,52.8 10.9,52.8 D3.3
  Bottom Layer w1: K1.3 1.788,19.588 2.563,19.588 3.5,20.525 3.5,25.5 1.5,27.5 1.5,47.71 6.881,53.091 6.881,53.141 X2.1
VACC: E1.1 X2.2 | length 3.1
  Top Layer w1: X2.2 9.185,57.985 12.235,57.985 E1.1
VBAT_CTRL: C8.1 D4.11 R1.1 R4.2 | length 25.1
  Top Layer w0.254: v1(5.2,47.6) 6.685,49.085 7.335,49.085 R1.1 ; v1(11.726,36.9) 11.82,36.9 11.897,36.977 12.727,36.977 D4.11
  Top Layer w0.5: R1.1 7.575,49.475 7.575,51.325 7.75,51.15 R4.2
  Bottom Layer w0.254: v1(5.2,47.6) 5.2,37.049 5.349,36.9 v1(11.726,36.9)
VBUS: X1.1 X2.3 | length 3.4
  Top Layer w0.35: X1.1@4.675,52.95 4.886,52.95 6.353,54.417 6.353,55.153 X2.3
VCC: C1.1 C4.1 C5.1 C6.1 C7.1 C12.1 C17.1 D1.1 D1.14 D2.1 D2.14 D3.5 D4.1 D4.9 D4.24 D4.36 D4.48 K1.1 R3.2 R5.2 R12.2 R15.2 R16.2 X3.1 X5.4 | length 198.6
  Top Layer w0.254: R16.2 4.7,35.1 6.5,33.3 R12.2 ; C1.1 9.05,45.4 10.262,44.189 12.211,44.189 12.9,43.5 13,43.5 ; C5.1 11.952,33.102 11.952,35.148 11.173,35.927 10.898,35.927 10.5,36.325 C6.1 10.632,36.482 10.632,37.132 11.477,37.977 12.727,37.977 D4.9 ; D4.1 12.877,42 12.9,42.023 12.9,43.4 13,43.5 ; D4.48 13,43.5 ; R3.2 16,46.35 16,47.45 ; 16,49 16,47.45 ; 16,49.4 16.2,49.2 D1.14 ; D1.1 16.025,47.475 16,47.45 ; D4.24 22.75,35 22.8,35.05 22.95,35.05 C4.1@23.1,35.05 ; D4.36 21.85,42.6 C7.1@23.65,42.6 ; D2.14 21.625,49.175 21.6,49.2 21.6,48 22.102,47.498 22.652,47.498 D2.1 ; C4.1 23,35.25 C4.1@23.1,35.35
  Top Layer w0.5: K1.1 4.423,24.95 4.973,25.5 v1(5,25.5) ; R16.2@3.5,35.05 R16.2 v1(3.5,36.75) ; v1(3.5,45.75) 3.594,45.75 3.844,45.5 C1.1 ; v1(12.75,51.25) 12.769,51.269 12.769,51.569 13.5,52.3 13.5,53.55 14.65,54.7 D3.5 16,54.7 ; R15.2 v1(15,13.6) ; 16,49 16,49.4 16,54.7 ; 21.6,49.2 21.6,54.457 21.307,54.75 ; C4.1@23.1,35.05 23.286,35.05 C4.1@23.343,35.107 ; C4.1 27.989,35.15 28.142,34.997 v5(28.25,34.997) 28.25,32.196 28.75,31.696 v5(28.75,27.75) ; C4.1@23.1,35.35 C4.1@23.2,35.25 ; C7.1 23.675,42.5 23.95,42.775 23.95,42.85 26.15,45.05 27.475,45.05 27.75,45.325 27.75,45.375 28.375,46 29.42,46 X3.1 ; X5.4 29.648,49.71 28.808,50.55 R5.2 27,53.8 26.05,54.75 21.307,54.75 ; 16,54.7 17.15,54.7 C12.1 19.05,54.75 21.307,54.75
  Bottom Layer w0.5: v1(12.75,51.25) 7.25,51.25 3.5,47.5 v1(3.5,45.75) v1(3.5,36.75) 3.5,27 5,25.5 4.981,25.481 4.981,24.454 4.653,24.126 4.653,14.347 5.353,13.647 15,13.647 23.247,13.647 28.75,19.15 v5(28.75,27.75) ; v5(28.25,34.997) 28.25,40.429 28.596,40.775 28.596,45.176 X3.1 X5.4
pads on no net: BQ1.2 BQ1.4 D1.2 D1.3 D1.13 D1.15 D2.2 D2.3 D2.13 D2.15 D2.16 D4.22 D4.29 K1.2 K1.7 X1.2 X1.3 X1.4 X2.4

## Polygon pours and split planes (outlines as drawn)
GND on Top Layer "GND_POLYGON" (solid, pour order 1): 0,60 32,60 32,10 26.5,10 26.5,0 0.5,0 0,0.5
GND on Bottom Layer "GND_POLYGON" (solid, pour order 0): 0,0 26.5,0 26.5,10 32,10 32,60 0,60

## Keep-outs
Keep-Out Layer:
  the board outline again, w0.1

## Silkscreen, mask and mechanical layers (free items; w line width, h text height)
Top Overlay:
  lines w0.2: 0,10 26.2,10
Bottom Overlay:
  lines w0.2: 0,10 26.3,10
Top Solder:
  rectangle: 11.6,52.35 12.825,55.15
  rectangle: 3.2,48.3 4.975,54.9
  rectangle: 22.475,47.175 24.925,47.725
  rectangle: 22.475,49.625 24.925,50.175
  rectangle: 24.65,47.95 25.2,49.4
  rectangle: 22.2,47.95 22.75,49.4
  rectangle: 16.5,47.975 17.05,49.425
  rectangle: 18.95,47.975 19.5,49.425
  rectangle: 16.8,49.65 19.25,50.2
  rectangle: 16.775,47.2 19.225,47.75
  rectangle: 16.75,47.75 16.775,47.775

## Text inside footprints (layer, text, board x,y; h text height)
A2: Bottom Overlay "1 - GND / 2 - VCC / 3 - RST / 4 - NSS / 5 - SCK / 6 - MOSI / 7 - MISO / 8 - DIO0" at 25.93,25.67 h1 r90
D1: Top Overlay "X" at 16,48.807 h1 r90; Top Overlay "Y" at 17.75,50.557 h1 r90
D2: Top Overlay "Y" at 23.45,50.532 h1 r90; Top Overlay "X" at 21.7,48.782 h1 r90
X1: Mechanical 13 "PCB EDGE" at 0.25,47.1 h0.41 r270